# EAGLE board Christmas_tree_panelized_PCBx4 (EAGLE 9.2.0)
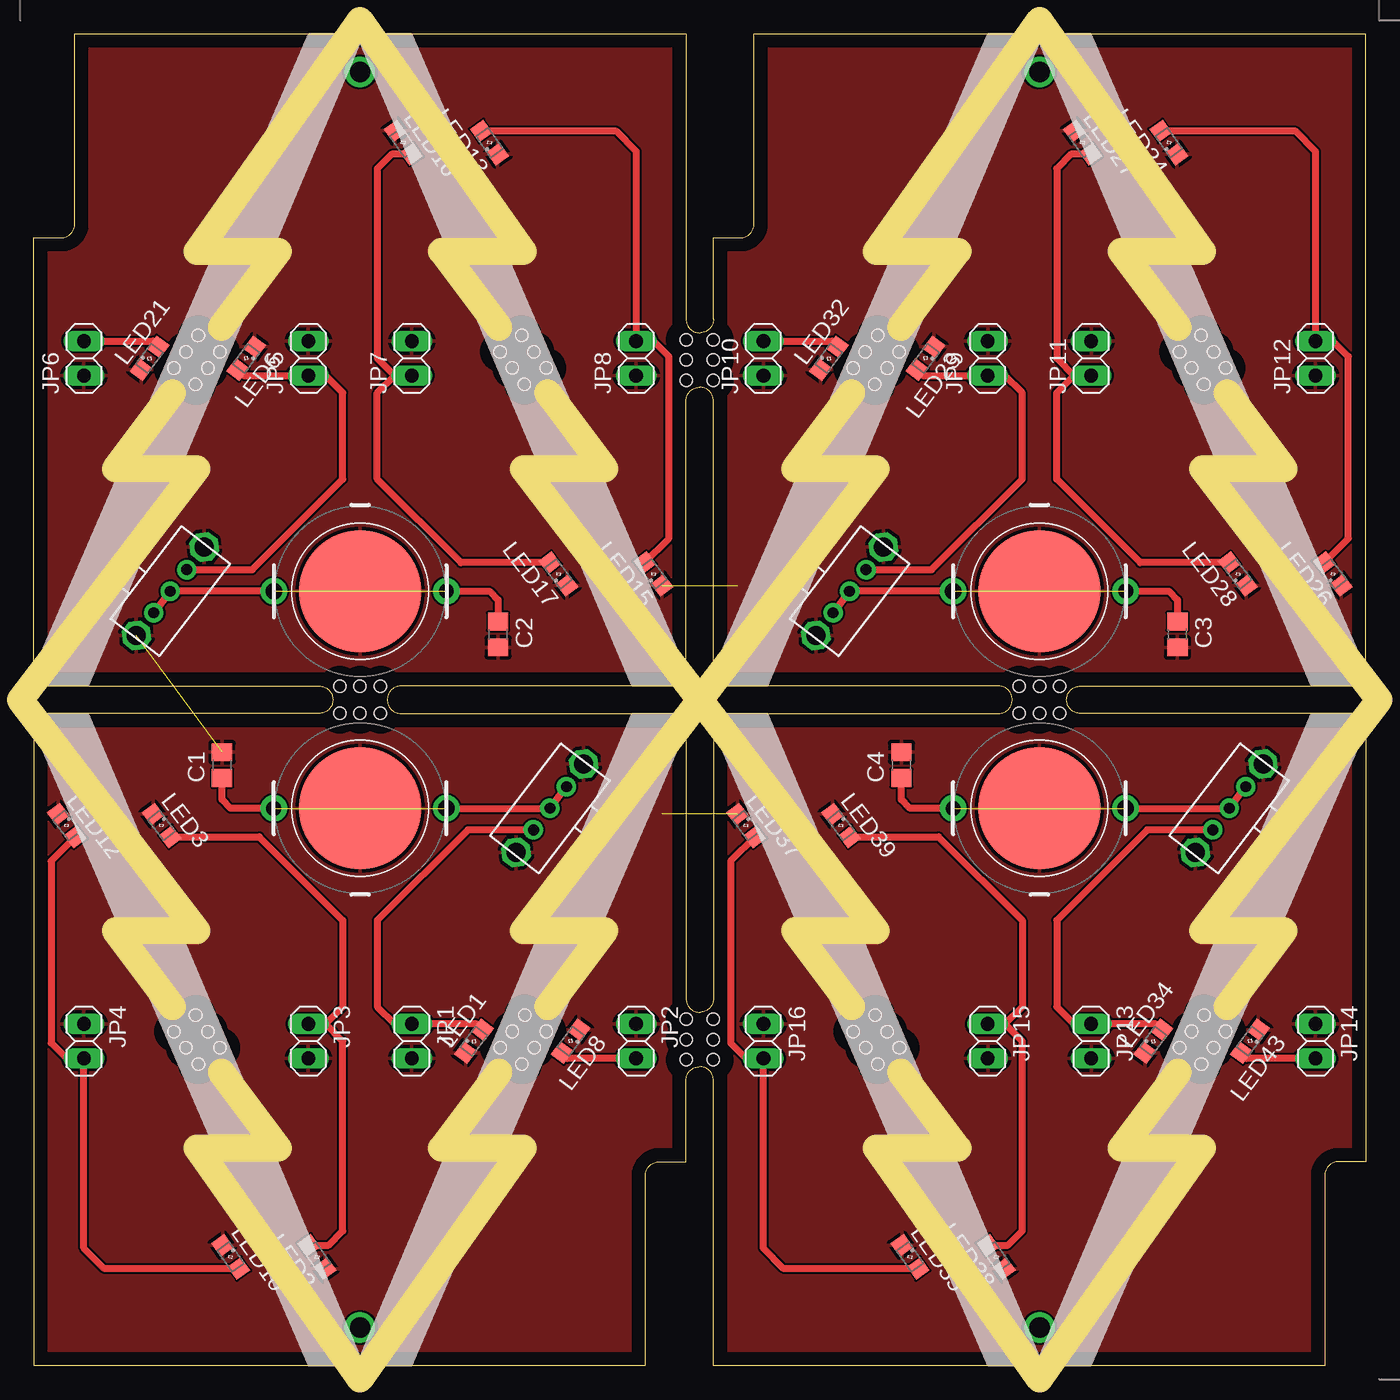
[diagram p0: board, top side]
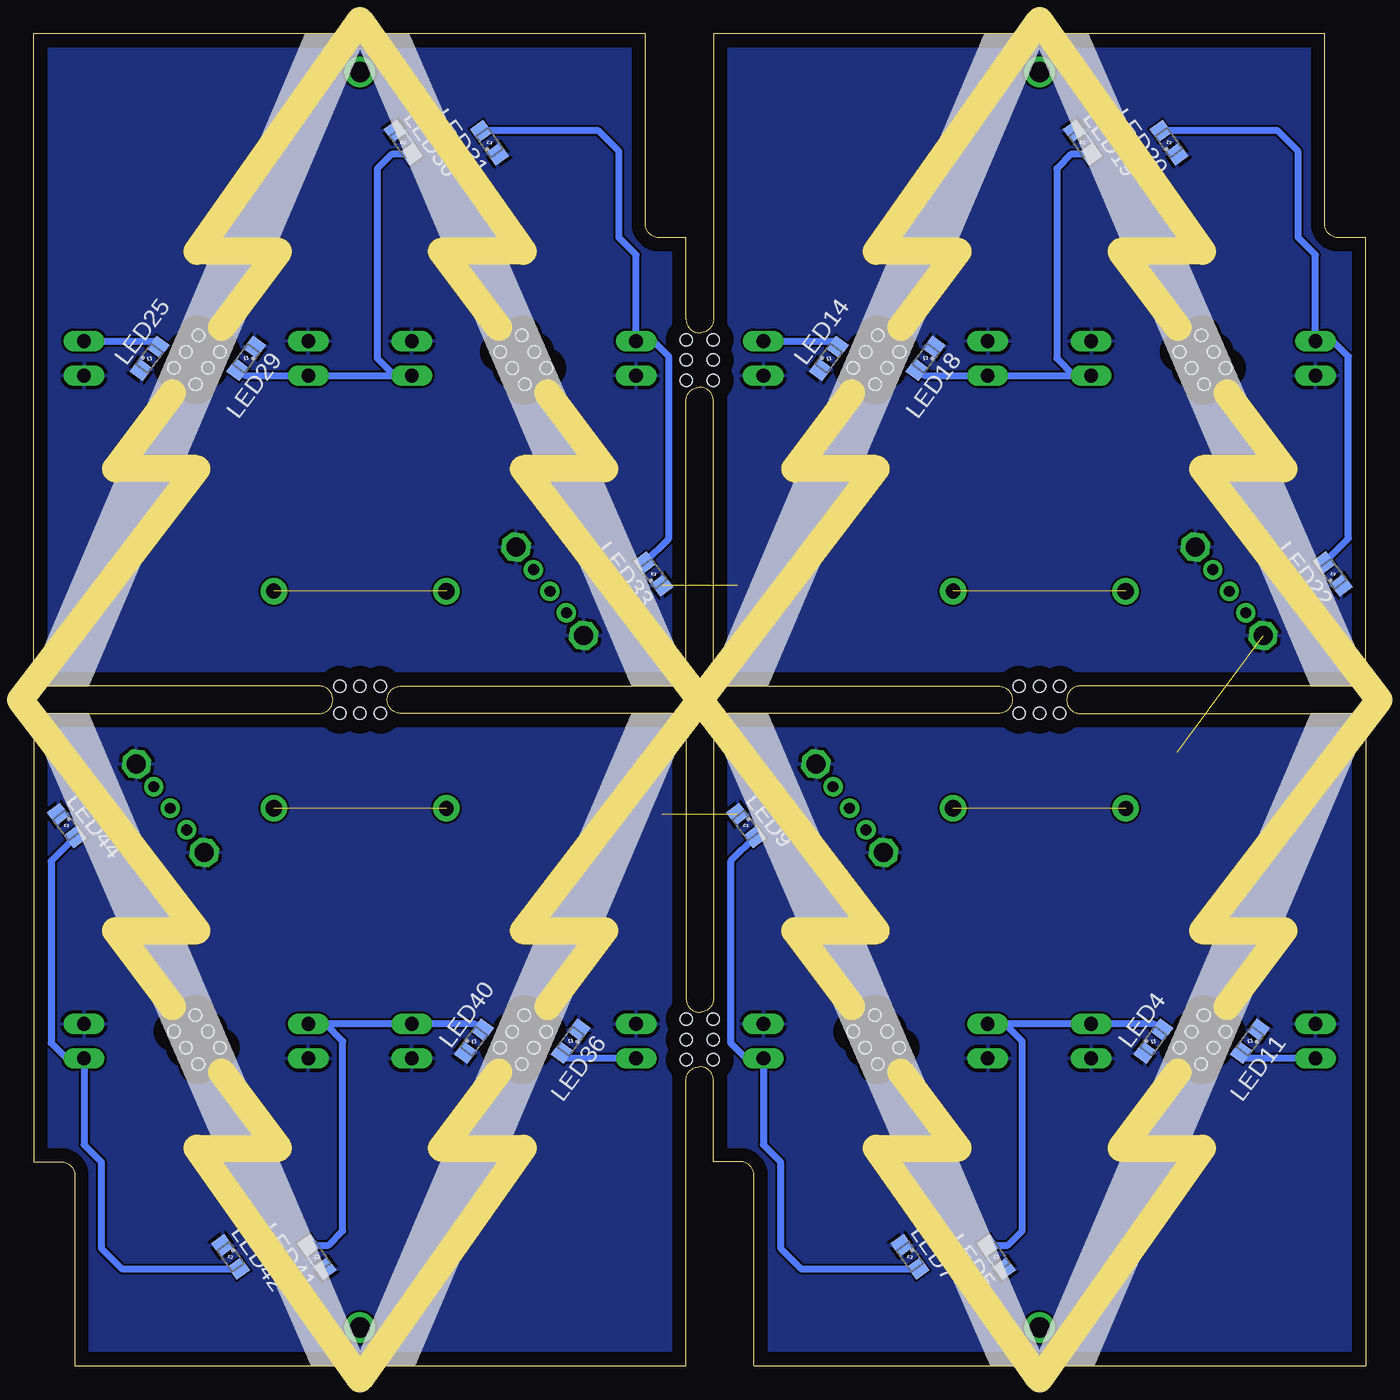
[diagram p1: board, bottom side, seen from below]

Size 98 x 98 mm. Coordinates in mm from the lower left corner, seen from the top.
Outline: 0,48 0,0 45,0 45,14 arc-90 46,15 48,15 48,21 arc-90 49,22 arc-90 50,21 50,0 95,0 95,14 arc-90 96,15 98,15 98,48 77,48 arc-90 76,49 arc-90 77,50 98,50 98,98 53,98 53,84 arc-90 52,83 50,83 50,77 arc-90 49,76 arc-90 48,77 48,98 3,98 3,84 arc-90 2,83 0,83 0,50 21,50 arc-90 22,49 arc-90 21,48 0,48
Outline: 48,50 27,50 arc90 26,49 arc90 27,48 48,48 48,27 arc90 49,26 arc90 50,27 50,48 71,48 arc90 72,49 arc90 71,50 50,50 50,71 arc90 49,72 arc90 48,71 48,50
Copper layers (1*16): Top 0.035mm / dielectric 1.5mm / Bottom 0.035mm
Design rules "default": minimum track width 6mil, minimum drill 0.35mm, track to track 6mil, track to pad 6mil, pad to pad 6mil, via to via 6mil, smd to smd 6mil, copper to edge 40mil, drill to drill 6mil, minimum pad ring 10mil, minimum via ring 8mil, stop-mask expansion 4mil, vias tented up to drill 0mil, thermal gap 10mil
Holes 0.9 mm at 36.81,23.39 35.21,24.59 37.71,24.6 36.11,25.79 34.31,23.39 35.91,22.19 11.2,23.39 12.8,24.59 12.1,22.19 13.7,23.38 11.9,25.79 10.3,24.59 11.19,74.61 12.79,73.41 10.29,73.4 11.89,72.21 13.69,74.61 12.09,75.81 36.8,74.61 35.2,73.41 35.9,75.81 34.3,74.62 36.1,72.21 37.7,73.41 61.19,74.61 62.79,73.41 60.29,73.4 61.89,72.21 63.69,74.61 62.09,75.81 86.8,74.61 85.2,73.41 85.9,75.81 84.3,74.62 86.1,72.21 87.7,73.41 86.81,23.39 85.21,24.59 87.71,24.6 86.11,25.79 84.31,23.39 85.91,22.19 61.2,23.39 62.8,24.59 62.1,22.19 63.7,23.38 61.9,25.79 60.3,24.59 74,50 75.5,50 72.5,50 72.5,48 74,48 75.5,48 24,50 24,48 25.5,48 25.5,50 22.5,50 22.5,48 48,74 50,74 50,75.5 48,75.5 48,72.5 50,72.5 48,24 50,24 50,25.5 48,25.5 48,22.5 50,22.5
tKeepout: 40 lines
bKeepout: 40 lines
Milling: 48 lines

## Footprints (pad centres in the part's own frame; a part is rotated, then mirrored left to right if it is on the bottom)
C0805 = smd 1.3 x 1.5: 1 -0.95,0; 2 0.95,0
1X02 = drill 1.016 long: 1 -1.27,0; 2 1.27,0
SML0805 = smd 1.2 x 1.2: A 1.05,0; C -1.05,0
CR1220_METAL_HOLDER = drill 1.2 pad 1.93: P$1 -6.35,0 | drill 1.1 pad 1.93: P$2 6.35,0 | smd 9 x 9: P$3 0,0
SK-12D07 = drill 0.8 pad 1.422: P$1 -2,0; P$2 0,0; P$3 2,0 | drill 1.4 octagon: P$4 -4.1,0; P$5 4.1,0

## Placement (x,y rotation side)
C1  10uf  [C0805]  13.84,44.19 90 top
C2  10uf  [C0805]  34.16,53.81 270 top
C3  10uf  [C0805]  84.16,53.81 270 top
C4  10uf  [C0805]  63.84,44.19 90 top
JP1  [1X02]  27.81,23.87 270 top
JP2  [1X02]  44.32,23.87 270 top
JP3  [1X02]  20.19,23.87 270 top
JP4  [1X02]  3.68,23.87 270 top
JP5  [1X02]  20.19,74.13 90 top
JP6  [1X02]  3.68,74.13 90 top
JP7  [1X02]  27.81,74.13 90 top
JP8  [1X02]  44.32,74.13 90 top
JP9  [1X02]  70.19,74.13 90 top
JP10  [1X02]  53.68,74.13 90 top
JP11  [1X02]  77.81,74.13 90 top
JP12  [1X02]  94.32,74.13 90 top
JP13  [1X02]  77.81,23.87 270 top
JP14  [1X02]  94.32,23.87 270 top
JP15  [1X02]  70.19,23.87 270 top
JP16  [1X02]  53.68,23.87 270 top
LED1  [SML0805]  32.38,23.87 53.2 top
LED2  [SML0805]  20.82,8 125.2 top
LED3  [SML0805]  9.39,39.74 307.4 top
LED4  [SML0805]  15.62,23.87 53.2 bottom
LED5  [SML0805]  27.18,8 125.2 bottom
LED6  [SML0805]  15.62,74.13 233.2 top
LED7  [SML0805]  33.52,8 305.2 bottom
LED8  [SML0805]  39.49,23.87 233.2 top
LED9  [SML0805]  45.59,39.74 307.4 bottom
LED10  [SML0805]  14.47,8 305.2 top
LED11  [SML0805]  8.51,23.87 233.2 bottom
LED12  [SML0805]  2.41,39.74 307.4 top
LED13  [SML0805]  33.52,90 125.2 top
LED14  [SML0805]  39.49,74.13 53.2 bottom
LED15  [SML0805]  45.59,58.26 127.4 top
LED16  [SML0805]  27.18,90 305.2 top
LED17  [SML0805]  38.6,58.26 127.4 top
LED18  [SML0805]  32.38,74.13 233.2 bottom
LED19  [SML0805]  20.82,90 305.2 bottom
LED20  [SML0805]  14.47,90 125.2 bottom
LED21  [SML0805]  8.51,74.13 53.2 top
LED22  [SML0805]  2.41,58.26 127.4 bottom
LED23  [SML0805]  65.62,74.13 233.2 top
LED24  [SML0805]  83.53,90 125.2 top
LED25  [SML0805]  89.49,74.13 53.2 bottom
LED26  [SML0805]  95.59,58.26 127.4 top
LED27  [SML0805]  77.17,90 305.2 top
LED28  [SML0805]  88.61,58.26 127.4 top
LED29  [SML0805]  82.38,74.13 233.2 bottom
LED30  [SML0805]  70.83,90 305.2 bottom
LED31  [SML0805]  64.47,90 125.2 bottom
LED32  [SML0805]  58.51,74.13 53.2 top
LED33  [SML0805]  52.41,58.26 127.4 bottom
LED34  [SML0805]  82.38,23.87 53.2 top
LED35  [SML0805]  64.47,8 305.2 top
LED36  [SML0805]  58.51,23.87 233.2 bottom
LED37  [SML0805]  52.41,39.74 307.4 top
LED38  [SML0805]  70.83,8 125.2 top
LED39  [SML0805]  59.4,39.74 307.4 top
LED40  [SML0805]  65.62,23.87 53.2 bottom
LED41  [SML0805]  77.17,8 125.2 bottom
LED42  [SML0805]  83.53,8 305.2 bottom
LED43  [SML0805]  89.49,23.87 233.2 top
LED44  [SML0805]  95.59,39.74 307.4 bottom
U$1  CR1220_METAL_HOLDER  [CR1220_METAL_HOLDER]  24,41.02 180 top
U$2  SK-12D07  [SK-12D07]  37.97,41.02 232.6 top
U$3  CR1220_METAL_HOLDER  [CR1220_METAL_HOLDER]  24,56.98 0 top
U$4  SK-12D07  [SK-12D07]  10.03,56.98 52.6 top
U$5  CR1220_METAL_HOLDER  [CR1220_METAL_HOLDER]  74,56.98 0 top
U$6  SK-12D07  [SK-12D07]  60.03,56.98 52.6 top
U$7  CR1220_METAL_HOLDER  [CR1220_METAL_HOLDER]  74,41.02 180 top
U$8  SK-12D07  [SK-12D07]  87.97,41.02 232.6 top

## Library data of the parts
C1-C4 = resistor
JP1-JP16 = pinhead
LED1-LED44 = led
U$1 U$3 U$5 U$7 = sapin
U$2 U$4 U$6 U$8 = pins_fusee_esieespace

## Nets
GND: C1.2 C2.2 C3.2 C4.2 JP1.2 JP2.1 JP3.2 JP4.1 JP5.2 JP6.1 JP7.2 JP8.1 JP9.2 JP10.1 JP11.2 JP12.1 JP13.2 JP14.1 JP15.2 JP16.1 LED1.C LED2.C LED3.C LED4.C LED5.C LED6.C LED7.C LED8.C LED9.C LED10.C LED11.C LED12.C LED13.C LED14.C LED15.C LED16.C LED17.C LED18.C LED19.C LED20.C LED21.C LED22.C LED23.C LED24.C LED25.C LED26.C LED27.C LED28.C LED29.C LED30.C LED31.C LED32.C LED33.C LED34.C LED35.C LED36.C LED37.C LED38.C LED39.C LED40.C LED41.C LED42.C LED43.C LED44.C U$1.P$3 U$2.P$4 U$2.P$5 U$3.P$3 U$4.P$4 U$4.P$5 U$5.P$3 U$6.P$4 U$6.P$5 U$7.P$3 U$8.P$4 U$8.P$5
N$1: C1.1 U$1.P$1 U$1.P$2 U$2.P$1 U$2.P$2
N$2: JP2.2 LED7.A LED8.A LED9.A
N$3: JP4.2 LED10.A LED11.A LED12.A
N$5: JP6.2 LED20.A LED21.A LED22.A
N$6: JP1.1 JP3.1 LED1.A LED2.A LED3.A LED4.A LED5.A U$2.P$3
N$7: JP8.2 LED13.A LED14.A LED15.A
N$8: JP5.1 JP7.1 LED6.A LED16.A LED17.A LED18.A LED19.A U$4.P$3
N$9: C2.1 U$3.P$1 U$3.P$2 U$4.P$1 U$4.P$2
N$11: JP10.2 LED31.A LED32.A LED33.A
N$12: JP12.2 LED24.A LED25.A LED26.A
N$13: JP9.1 JP11.1 LED23.A LED27.A LED28.A LED29.A LED30.A U$6.P$3
N$14: C3.1 U$5.P$1 U$5.P$2 U$6.P$1 U$6.P$2
N$16: JP14.2 LED42.A LED43.A LED44.A
N$17: JP16.2 LED35.A LED36.A LED37.A
N$18: JP13.1 JP15.1 LED34.A LED38.A LED39.A LED40.A LED41.A U$8.P$3
N$19: C4.1 U$7.P$1 U$7.P$2 U$8.P$1 U$8.P$2

## Tracks (layer width: path | path; a pad name or v marks a point on that pad's centre or on a via)
GND  (3 unrouted)
  pour Top: -1,-1 -1,99 99,99 99,-1
  pour Bottom: -2,-2 -2,100 100,100 100,-2
N$1  (1 unrouted)
  Top 0.508: U$1.P$1 U$2.P$2 U$2.P$1 | U$1.P$2 14.47,41.02 13.84,41.65 C1.1
N$2
  Top 0.508: JP2.2 39.24,22.6 38.87,22.98 LED8.A
  Bottom 0.508: LED7.A 41.56,7.14 43.05,8.63 43.05,14.98 44.32,16.25 JP2.2 45.59,22.6 46.73,23.74 46.73,37.13 LED9.A
N$3
  Top 0.508: LED10.A 5.17,7.14 3.68,8.63 JP4.2 2.41,22.6 1.27,23.74 1.27,37.13 LED12.A
  Bottom 0.508: LED11.A 8.96,22.6 JP4.2
N$4  (via drill 1.5 pad 1.7)
  other vias: 24,2.79
N$5
  Top 0.508: JP6.2 8.76,75.4 9.13,75.03 LED21.A
  Bottom 0.508: LED20.A 6.44,90.86 4.95,89.37 4.95,83.02 3.68,81.75 JP6.2 2.41,75.4 1.27,74.26 1.27,60.87 LED22.A
N$6
  Top 0.508: LED1.A 32.58,25.14 JP1.1 26.54,25.14 25.27,26.41 25.27,32.76 31.94,39.43 U$2.P$3 | LED3.A 16.58,38.91 22.73,32.76 22.73,26.41 21.46,25.14 | LED2.A 21.68,8.85 22.73,9.9 22.73,23.87 21.46,25.14 | JP3.1 21.46,25.14
  Bottom 0.508: LED4.A 15.54,25.14 JP3.1 26.54,25.14 | 26.54,25.14 JP1.1 | LED5.A 26.32,8.85 25.27,9.9 25.27,23.87 26.54,25.14
N$7
  Top 0.508: LED13.A 42.83,90.86 44.32,89.37 JP8.2 45.59,75.4 46.73,74.26 46.73,60.87 LED15.A
  Bottom 0.508: LED14.A 39.04,75.4 JP8.2
N$8
  Top 0.508: LED6.A 15.42,72.86 JP5.1 21.46,72.86 22.73,71.59 22.73,65.24 16.06,58.57 U$4.P$3 | LED17.A 31.42,59.09 25.27,65.24 25.27,71.59 26.54,72.86 | LED16.A 26.32,89.15 25.27,88.1 25.27,74.13 26.54,72.86 | JP7.1 26.54,72.86
  Bottom 0.508: LED18.A 32.45,72.86 JP7.1 21.46,72.86 | 21.46,72.86 JP5.1 | LED19.A 21.68,89.15 22.73,88.1 22.73,74.13 21.46,72.86
N$9  (1 unrouted)
  Top 0.508: U$3.P$1 U$4.P$2 U$4.P$1 | U$3.P$2 33.52,56.98 34.16,56.35 C2.1
N$10  (via drill 1.5 pad 1.7)
  other vias: 24,95.21
N$11
  Top 0.508: JP10.2 58.76,75.4 59.13,75.03 LED32.A
  Bottom 0.508: LED31.A 56.44,90.86 54.95,89.37 54.95,83.02 53.68,81.75 JP10.2 52.41,75.4 51.27,74.26 51.27,60.87 LED33.A
N$12
  Top 0.508: LED24.A 92.83,90.86 94.32,89.37 JP12.2 95.59,75.4 96.73,74.26 96.73,60.87 LED26.A
  Bottom 0.508: LED25.A 89.04,75.4 JP12.2
N$13
  Top 0.508: LED23.A 65.42,72.86 JP9.1 71.46,72.86 72.73,71.59 72.73,65.24 66.06,58.57 U$6.P$3 | LED28.A 81.42,59.09 75.27,65.24 75.27,71.59 76.54,72.86 | LED27.A 76.32,89.15 75.27,88.1 75.27,74.13 76.54,72.86 | JP11.1 76.54,72.86
  Bottom 0.508: LED29.A 82.45,72.86 JP11.1 71.46,72.86 | 71.46,72.86 JP9.1 | LED30.A 71.68,89.15 72.73,88.1 72.73,74.13 71.46,72.86
N$14  (1 unrouted)
  Top 0.508: U$5.P$1 U$6.P$2 U$6.P$1 | U$5.P$2 83.53,56.98 84.16,56.35 C3.1
N$15  (via drill 1.5 pad 1.7)
  other vias: 74,95.21
N$16
  Top 0.508: JP14.2 89.24,22.6 88.86,22.98 LED43.A
  Bottom 0.508: LED42.A 91.56,7.14 93.05,8.63 93.05,14.98 94.32,16.25 JP14.2 95.59,22.6 96.73,23.74 96.73,37.13 LED44.A
N$17
  Top 0.508: LED35.A 55.17,7.14 53.68,8.63 JP16.2 52.41,22.6 51.27,23.74 51.27,37.13 LED37.A
  Bottom 0.508: LED36.A 58.96,22.6 JP16.2
N$18
  Top 0.508: LED34.A 82.58,25.14 JP13.1 76.54,25.14 75.27,26.41 75.27,32.76 81.94,39.43 U$8.P$3 | LED39.A 66.58,38.91 72.73,32.76 72.73,26.41 71.46,25.14 | LED38.A 71.68,8.85 72.73,9.9 72.73,23.87 71.46,25.14 | JP15.1 71.46,25.14
  Bottom 0.508: LED40.A 65.55,25.14 JP15.1 76.54,25.14 | 76.54,25.14 JP13.1 | LED41.A 76.32,8.85 75.27,9.9 75.27,23.87 76.54,25.14
N$19  (1 unrouted)
  Top 0.508: U$7.P$1 U$8.P$2 U$8.P$1 | U$7.P$2 64.47,41.02 63.84,41.65 C4.1
N$20  (via drill 1.5 pad 1.7)
  other vias: 74,2.79